# Altium PCB PCB2test.PcbDoc
Units mm, origin at the board's own origin, x right, y up, seen from the top; angles counter-clockwise.
Board outline 41 x 58.5 mm, 2 copper layers (Top Layer, Bottom Layer); 36 components, 23 nets, 140 pads, 2 vias.
Unrouted connection lines stored in the file: 17.
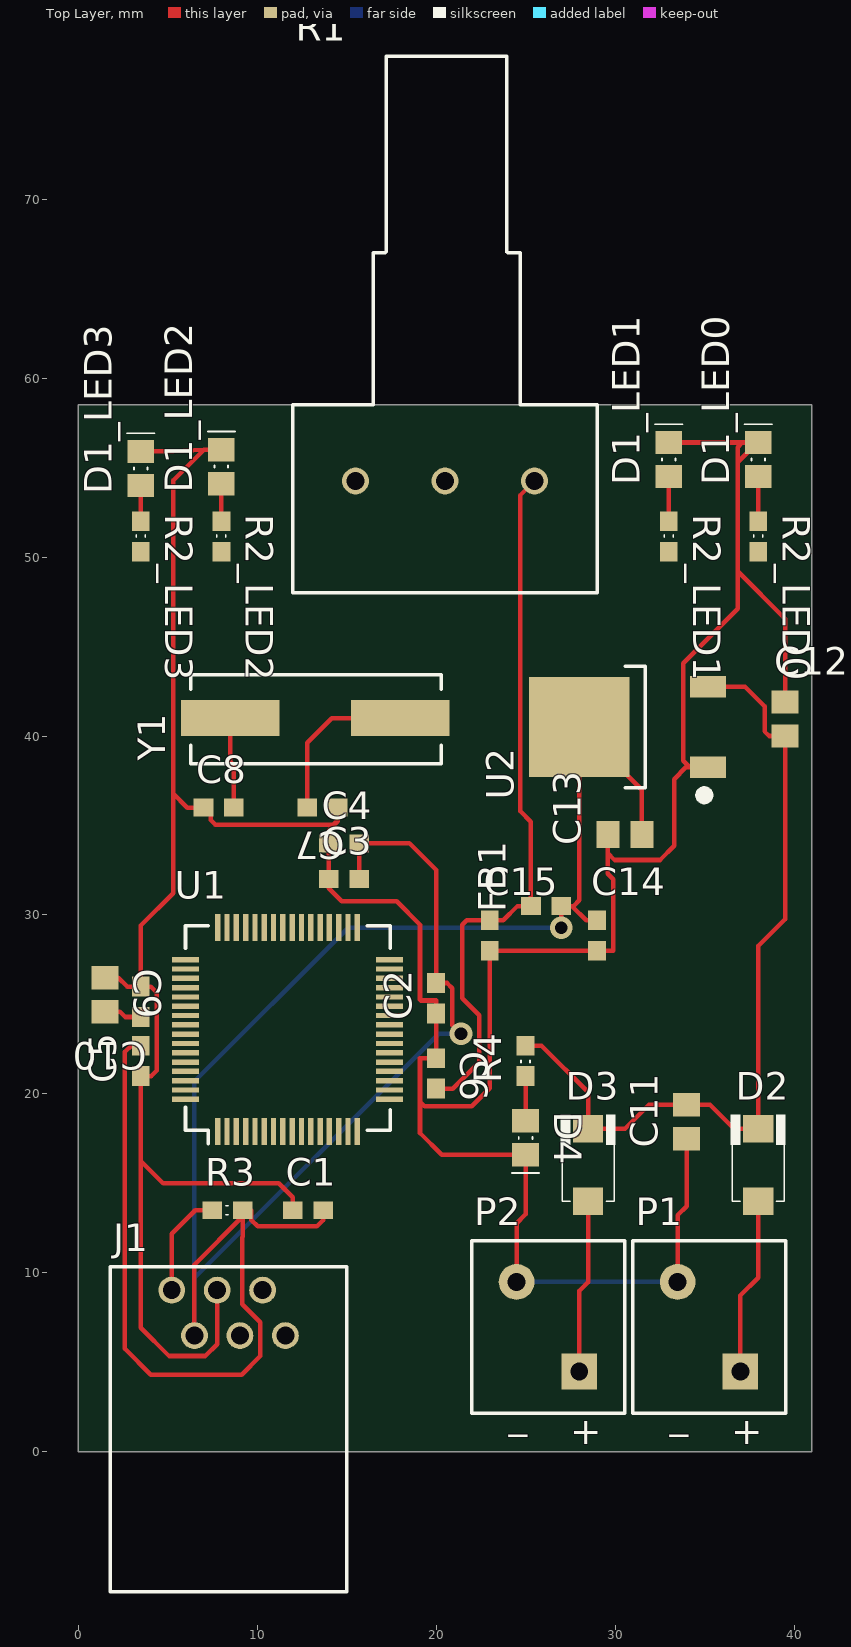
[diagram p0: Top Layer view]
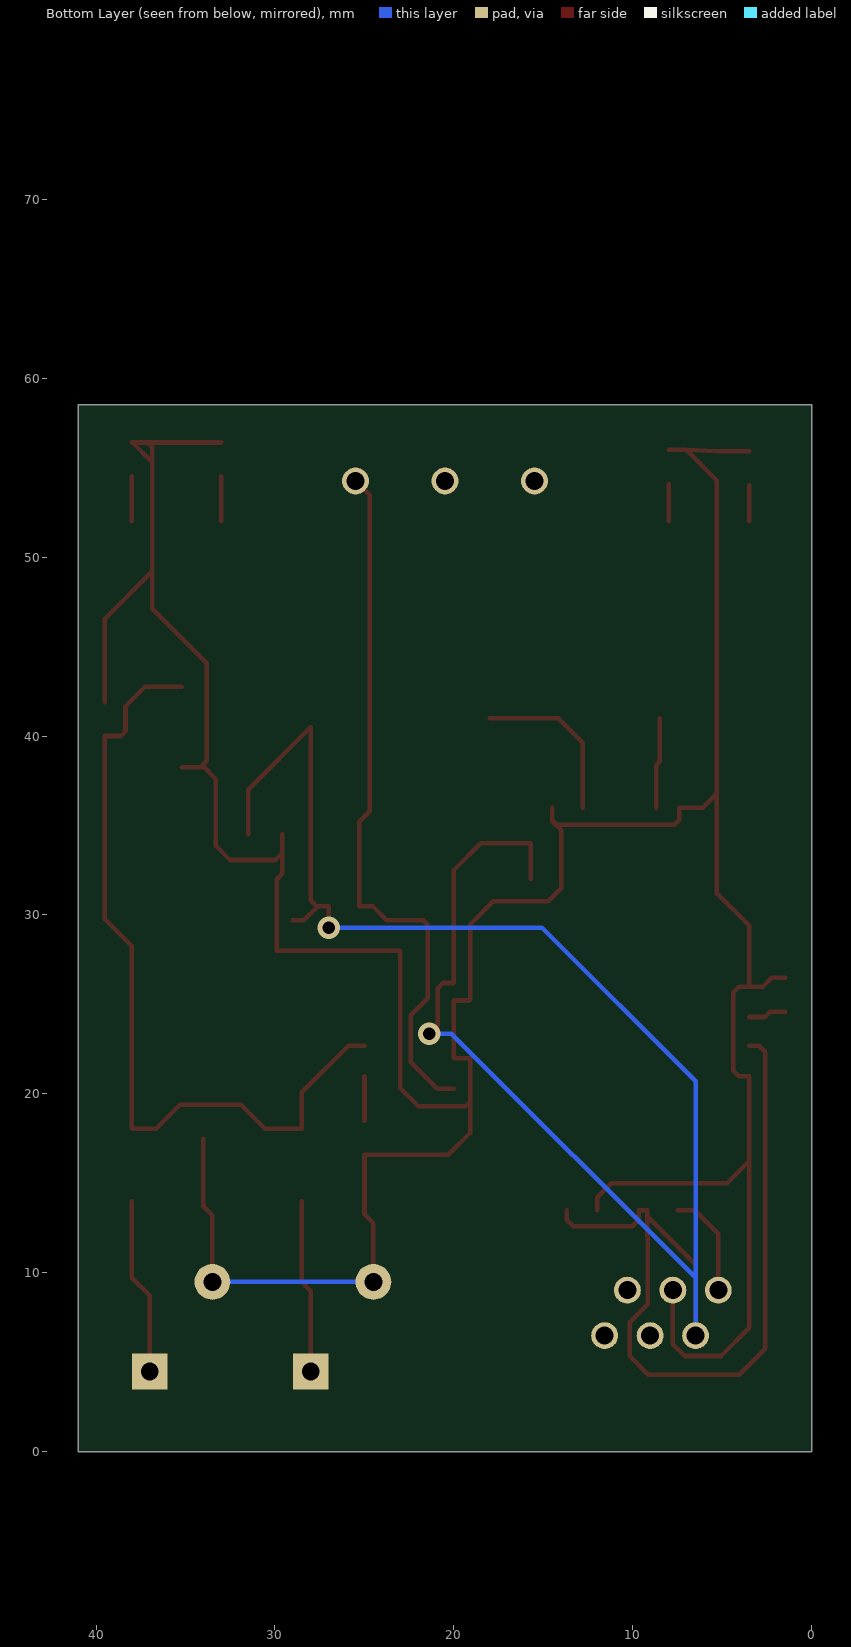
[diagram p1: Bottom Layer view, seen from below]

## Layer stack, top to bottom
Top Solder: solder mask 0.0102, Solder Resist, Dk 3.5
Top Layer: signal copper 0.0356
Dielectric 1: dielectric 0.32, FR-4, Dk 4.8
Bottom Layer: signal copper 0.0356
Bottom Solder: solder mask 0.0102, Solder Resist, Dk 3.5

## Board outline
0,0 41,0 41,58.5 0,58.5

## Design rules (kind name [scope] priority, off if disabled: settings)
Clearance [All] p1: gap=0.254
HoleSize [All] p1: absolutevalues=TRUE maxlimit=0.5 minlimit=0.3 maxpercent=80.000 minpercent=20.000
PolygonConnect [All] p1: connectstyle=Relief reliefconductorwidth=0.254 reliefentries=4 polygonreliefangle="90 Angle" airgapwidth=0.254
RoutingVias [All] p1: holewidth=0.711 width=1.27 viastyle="Through Hole" minholewidth=0.711 minwidth=1.27 maxholewidth=0.711 maxwidth=1.27
SolderMaskExpansion [All] p1: expansion=0.102
UnpouredPolygon [All] p1: allowunpoured=FALSE
Width [All] p1: maxlimit=0.254 minlimit=0.2 preferedwidth=0.254 minimp=50.000000 maximp=50.000000 favimp=50.000000
28 further rules are at their usual default settings.

## Classes and differential pairs
channel class led: LED0 LED1 LED2 LED3
component class TP2: R1
component class POWER: C11 C12 C13 C14 C15 D2 D3 D4 FB1 P1 P2 R4 U2
component class PIC: C1 C2 C3 C4 C5 C6 C7 C8 C9 C10 J1 R3 U1 Y1
component class LED3: D1_LED3 R2_LED3
component class LED2: D1_LED2 R2_LED2
component class LED1: D1_LED1 R2_LED1
component class LED0: D1_LED0 R2_LED0

## Components (designator, comment, footprint, x,y, rotation, side; value= is the part's Value field where it differs from the comment)
C1 "100nF" CAPC1608N 12,13.5 r0 top
C2 "100nF" CAPC1608N 20,24.5 r90 top
C3 "100nF" CAPC1608N 14,32 r0 top
C4 "100nF" CAPC1608N 14,34 r0 top
C5 "100nF" CAPC1608N 3.5,21 r90 top
C6 "100nF" CAPC1608N 20,22 r270 top
C7 "20pF" CAPC1608N 14.5,36 r180 top
C8 "20pF" CAPC1608N 7,36 r0 top
C9 "10uF 6.3V" CAPC2012N 1.5,26.5 r270 top
C10 "1uF 6.3V" CAPC1608N 3.5,26 r270 top
C11 "10uF 6.3V" CAPC2012N 34,17.5 r90 top
C12 "10uF 6.3V" CAPC2012N 39.5,40 r90 top
C13 "10uF 6.3V" CAPC2012N 31.5,34.5 r180 top
C14 "1uF 6.3V" CAPC1608N 29,28 r90 top
C15 "100nF" CAPC1608N 23,28 r90 top
D1_LED0 "Green LED" "LED 0805" 38,54.5 r90 top (schematic designator D1)
D1_LED1 "Green LED" "LED 0805" 33,54.5 r90 top (schematic designator D1)
D1_LED2 "Green LED" "LED 0805" 8,54.1 r90 top (schematic designator D1)
D1_LED3 "Green LED" "LED 0805" 3.5,54 r90 top (schematic designator D1)
D2 "GF1A" SMA/DO-214AC_21 38,14 r90 top
D3 "GF1A" SMA/DO-214AC_21 28.5,14 r90 top
D4 "Green LED" "LED 0805" 25,18.5 r270 top
FB1 "600r" INDC1608AN 27,30.5 r180 top
J1 "Program / Debug" RJ12_90 6.5,6.5 r0 top
P1 "12V Main" PHOENIX_1985195 37,4.5 r0 top
P2 "12V Battery" PHOENIX_1985195 28,4.5 r0 top
R1 "1K" PDB181-K415K-102A2 12,47 r0 top
R2_LED0 "330r" RESC1608N 38,52 r270 top (schematic designator R2)
R2_LED1 "330r" RESC1608N 33,52 r270 top (schematic designator R2)
R2_LED2 "330r" RESC1608N 8,52 r270 top (schematic designator R2)
R2_LED3 "330r" RESC1608N 3.5,52 r270 top (schematic designator R2)
R3 "4.7k" RESC1608N 7.5,13.5 r0 top
R4 "470r" RESC1608N 25,21 r90 top
U1 "PIC32MX764F128H-I/PT" QFP50P1200X1200X120-64 6,27.5 r0 top
U2 "AP1117" TD03B_N 28,40.5 r90 top
Y1 "8MHz" "HC49/4H SMX CRYSTAL" 18,41 r180 top

## Footprints (in the part's own frame and the unit in brackets; to place one, negate y for a bottom-side part, rotate by r counter-clockwise, add the part's x,y. Pads: shape width x height; smd on the part's side, far side on the other; paste and mask are expansions set on the pad)
CAPC1608N [mm]
  rect 1.1x1 smd: 1(0,0) 2(1.7,0)
CAPC2012N [mm]
  rect 1.3x1.5 smd: 1(0,0) 2(1.9,0)
"HC49/4H SMX CRYSTAL" [mm]
  rect 5.5x2 smd: 1(9.5,0) 2(0,0)
  silkscreen extent -2.29,-2.41 11.71,2.54
INDC1608AN [mm]
  rect 1.1x1 smd: 1(0,0) 2(1.7,0)
"LED 0805" [mm]
  rect 1.3x1.5 smd: 1(0,0) 2(1.9,0)
  silkscreen extent 0.89,-0.76 2.92,0.76
PDB181-K415K-102A2 [mm]
  round 1.5 hole 1: 1(13.5,7.25) 2(8.5,7.25) 3(3.5,7.25)
  silkscreen extent 0,1.02 17,30.99
PHOENIX_1985195 [mm]
  rect 2x2 hole 1: 1(0,0)
  round 2 hole 1: 2(-3.5,5)
  silkscreen extent -6,-2.35 2.54,7.3
QFP50P1200X1200X120-64 [mm]
  rect 0.3x1.5 smd: 1(1.8,-9.6) 2(2.32,-9.6) 3(2.84,-9.6) 4(3.36,-9.6) 5(3.88,-9.6) 6(4.4,-9.6) 7(4.92,-9.6) 8(5.44,-9.6) 9(5.96,-9.6) 10(6.48,-9.6) 11(7,-9.6) 12(7.52,-9.6) 13(8.04,-9.6) 14(8.56,-9.6) 15(9.08,-9.6) 16(9.6,-9.6) 33(9.6,1.8) 34(9.08,1.8) 35(8.56,1.8) 36(8.04,1.8) 37(7.52,1.8) 38(7,1.8) 39(6.48,1.8) 40(5.96,1.8) 41(5.44,1.8) 42(4.92,1.8) 43(4.4,1.8) 44(3.88,1.8) 45(3.36,1.8) 46(2.84,1.8) 47(2.32,1.8) 48(1.8,1.8)
  rect 1.5x0.3 smd: 17(11.4,-7.8) 18(11.4,-7.28) 19(11.4,-6.76) 20(11.4,-6.24) 21(11.4,-5.72) 22(11.4,-5.2) 23(11.4,-4.68) 24(11.4,-4.16) 25(11.4,-3.64) 26(11.4,-3.12) 27(11.4,-2.6) 28(11.4,-2.08) 29(11.4,-1.56) 30(11.4,-1.04) 31(11.4,-0.52) 32(11.4,0) 49(0,0) 50(0,-0.52) 51(0,-1.04) 52(0,-1.56) 53(0,-2.08) 54(0,-2.6) 55(0,-3.12) 56(0,-3.64) 57(0,-4.16) 58(0,-4.68) 59(0,-5.2) 60(0,-5.72) 61(0,-6.24) 62(0,-6.76) 63(0,-7.28) 64(0,-7.8)
  silkscreen extent 0,-10.29 11.43,1.91
RESC1608N [mm]
  rect 1.1x1 smd: 1(0,0) 2(1.7,0)
  silkscreen extent 0.76,-0.25 0.89,0.25
RJ12_90 [mm]
  round 1.5 hole 1: 1(-1.27,2.54) 2(0,0) 3(1.27,2.54) 4(2.54,0) 5(3.81,2.54) 6(5.08,0)
  silkscreen extent -4.7,-14.32 8.51,3.84
SMA/DO-214AC_21 [mm]
  rect 1.52x1.68 smd: 1(0,0) 2(4.06,0)
  silkscreen extent 0,-1.52 4.83,1.52
TD03B_N [mm]
  rect 1.2x2 smd: 1(-2.25,-7.2) 3(2.25,-7.2)
  rect 5.6x5.6 smd: 4(0,0)
  silkscreen extent -4.19,-7.37 3.4,-2.57

## Part data
C1 C2 C3 C4 C5 C6 C7 C8 C9 C10 C11 C12 C13 C14 C15: library part Cap, "Capacitor"
D1_LED0 D1_LED1 D1_LED2 D1_LED3 D4: library part LED0, "Typical INFRARED GaAs LED"
D2 D3: library part Diode, "Default Diode"
FB1: library part Inductor, "Inductor"
J1: library part "Header 6", "Header, 6-Pin"
P1 P2: library part "Header 2", "Header, 2-Pin"
R1: library part "RPot SM", "Potentiometer"
R2_LED0 R2_LED1 R2_LED2 R2_LED3 R3 R4: library part Res1, "Resistor"
U1: "PIC32MX764F128H"
U2: "1A LDO, 18V input, DPAK"
Y1: library part XTAL, "Crystal Oscillator"

## Via types
v1: diameter 1.27, hole 0.711, Top Layer to Bottom Layer, 2 vias

## Nets (pads, with @x,y where several pads share a name; then routed paths per layer and width w, separated by ;. In a path a pad name is that pad's centre, name@x,y a point inside that pad or via, vN(x,y) a via of type N, cw(c..) or ccw(c..) an arc to the next point about the centre after c; other vN are vias at no path point)
ALIM: D2.1 P1.1 | length 9.9
  Top Layer w0.254: P1.1 37,8.738 38,9.738 D2.1
BATTERY: D3.1 P2.1 | length 9.7
  Top Layer w0.254: P2.1 28,8.992 28.5,9.492 D3.1
GND: C1.1 C2.1 C3.1 C4.1 C5.1 C6.1 C7.1 C8.1 C9.1 C10.1 C11.1 C12.2 C13.2 C14.1 C15.1 D1_LED0.2 D1_LED1.2 D1_LED2.2 D1_LED3.2 D4.2 J1.3 P1.2 P2.2 U1.9 U1.20 U1.25 U1.41 U2.1 | length 212.7
  Top Layer w0.254: C9.1 2.235,26.5 2.735,26 C10.1 ; D1_LED3.2 5.309,55.9 7.03,56 ; J1.3 7.77,6.017 7.112,5.359 5.08,5.359 3.5,6.939 3.5,16.256 ; D1_LED2.2 7.03,56 ; C1.1 12,14.224 11.213,15.011 4.745,15.011 3.5,16.256 ; C7.1 14.5,35.306 ; P2.2 24.5,12.776 25,13.276 D4.2 20.32,16.6 19.101,17.819 19.101,19.558 ; C13.2 29.6,33.443 ; D1_LED1.2 37.121,56.4 ; P1.2 33.5,13.233 34,13.733 C11.1 ; U2.1 34.165,38.25 ; D1_LED0.2 D1_LED0.2@37.96,56.4 ; C12.2 39.5,46.558 36.855,49.203 ; 3.5,16.256 C5.1 4.084,21 4.394,21.311 4.394,25.67 4.064,26 C10.1 ; C10.1 3.5,29.413 5.309,31.222 5.309,36.787 ; 5.309,36.787 6.096,36 C8.1 7.417,36 7.417,35.306 7.671,35.052 14.246,35.052 14.5,35.306 ; 5.309,36.787 5.309,54.278 7.03,56 ; 14.5,35.306 14.5,35.247 14,34.747 C4.1 C3.1 14,31.491 14.732,30.759 17.805,30.759 19.101,29.464 19.101,25.273 19.152,25.222 20,25.222 C2.1 20,23.241 C6.1 19.101,22 19.101,19.558 ; 19.101,19.558 19.355,19.304 21.984,19.304 23,20.32 C15.1 C14.1 29.896,28 29.896,32.004 29.6,32.3 29.6,33.443 ; 29.6,33.443 29.972,33.071 32.512,33.071 33.299,33.858 33.299,37.592 33.957,38.25 34.165,38.25 ; 34.165,38.25 33.807,38.608 33.807,44.069 36.855,47.117 36.855,49.203 ; 36.855,49.203 36.855,55.296 ; 36.855,55.296 36.855,56.134 37.121,56.4 ; 36.855,55.296 D1_LED0.2@37.96,56.4 ; 37.121,56.4 D1_LED0.2@37.96,56.4
  Bottom Layer w0.254: P2.2 P1.2
LED0: R2_LED0.2
LED1: R2_LED1.2
LED2: R2_LED2.2
LED3: R2_LED3.2
MCLR: J1.1 R3.1 U1.7 | length 6
  Top Layer w0.254: J1.1 5.23,12.192 6.538,13.5 R3.1
NetC9_2: C9.2 C10.2 U1.56 | length 2.1
  Top Layer w0.254: C9.2 2.337,24.6 2.637,24.3 C10.2
NetD1_LED0_1: D1_LED0.1 R2_LED0.1 | length 2.5
  Top Layer w0.254: R2_LED0.1 D1_LED0.1
NetD1_LED1_1: D1_LED1.1 R2_LED1.1 | length 2.5
  Top Layer w0.254: R2_LED1.1 D1_LED1.1
NetD1_LED2_1: D1_LED2.1 R2_LED2.1 | length 2.1
  Top Layer w0.254: R2_LED2.1 D1_LED2.1
NetD1_LED3_1: D1_LED3.1 R2_LED3.1 | length 2
  Top Layer w0.254: R2_LED3.1 3.5,52.984 D1_LED3.1
NetD4_1: D4.1 R4.1 | length 2.5
  Top Layer w0.254: D4.1 R4.1
NetR1_2: R1.2 U1.14
PGC: J1.5 U1.15
PGD: J1.4 U1.16
V3P3: C1.2 C2.2 C3.2 C4.2 C5.2 C13.1 C14.2 FB1.1 J1.2 R3.2 U1.10 U1.26 U1.35 U1.38 U1.57 U2.4 | length 145.5
  Top Layer w0.254: C5.2 2.964,22.7 2.616,22.352 2.616,5.766 4.064,4.318 9.144,4.318 10.185,5.359 10.185,7.239 9.169,8.255 9.169,11.989 9.2,12.019 R3.2@9.2,13.157 ; J1.2 6.5,10.457 R3.2@9.2,13.157 ; C1.2 13.7,12.954 13.344,12.598 10.033,12.598 9.677,12.954 9.677,13.5 R3.2 R3.2@9.2,13.157 ; C3.2 C4.2 18.512,34 20,32.512 C2.2 20.612,26.2 20.904,25.908 20.904,23.851 v1(21.387,23.368) ; v1(27,29.286) FB1.1 27.584,30.5 ; C14.2 28.384,29.7 27.584,30.5 ; C13.1 31.5,37 U2.4 28,30.814 27.686,30.5 27.584,30.5
  Bottom Layer w0.254: J1.2 6.5,9.726 ; v1(21.387,23.368) 20.142,23.368 6.5,9.726 ; v1(27,29.286) 15.085,29.286 6.5,20.701 6.5,9.726
V3P3A: C6.2 C15.2 FB1.2 R1.1 U1.19 | length 39.7
  Top Layer w0.254: C6.2 20.935,20.3 22.405,21.77 22.405,24.405 21.463,25.347 21.463,29.446 21.717,29.7 C15.2 23.749,29.7 24.549,30.5 FB1.2 25.3,35.204 24.714,35.79 24.714,53.464 R1.1
V5: C11.2 C12.1 D2.2 D3.2 R4.2 U2.3 | length 46
  Top Layer w0.254: R4.2 25.89,22.7 28.5,20.09 D3.2 30.556,18.06 31.896,19.4 C11.2 35.306,19.4 36.646,18.06 D2.2 38,28.27 39.5,29.77 C12.1 38.608,40 38.354,40.254 38.354,41.656 37.26,42.75 U2.3
VCC: R1.3
X1: C7.2 U1.39 Y1.2 | length 9.4
  Top Layer w0.254: C7.2 12.8,39.624 14.176,41 Y1.2
X2: C8.2 U1.40 Y1.1 | length 5.1
  Top Layer w0.254: Y1.1 8.5,38.579 8.7,38.379 C8.2
pads on no net: J1.6 U1.1 U1.2 U1.3 U1.4 U1.5 U1.6 U1.8 U1.11 U1.12 U1.13 U1.17 U1.18 U1.21 U1.22 U1.23 U1.24 U1.27 U1.28 U1.29 U1.30 U1.31 U1.32 U1.33 U1.34 U1.36 U1.37 U1.42 U1.43 U1.44 U1.45 U1.46 U1.47 U1.48 U1.49 U1.50 U1.51 U1.52 U1.53 U1.54 U1.55 U1.58 U1.59 U1.60 U1.61 U1.62 U1.63 U1.64

## Text inside footprints (layer, text, board x,y; h text height)
P1: Top Overlay "_" at 33.063,1.325 h1.52; Top Overlay "+" at 36.492,0.436 h1.52
P2: Top Overlay "_" at 24.063,1.325 h1.52; Top Overlay "+" at 27.492,0.436 h1.52